# Allegro board testBoard_v2.brd
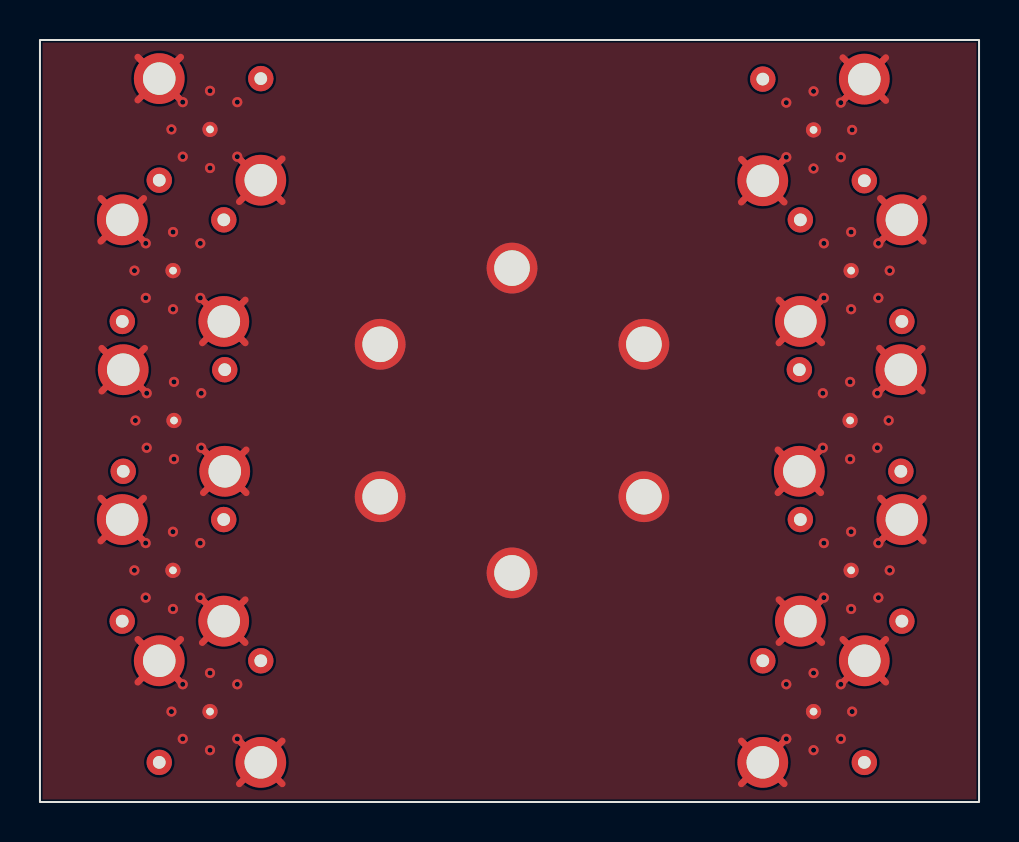
[diagram p0: board, top side]
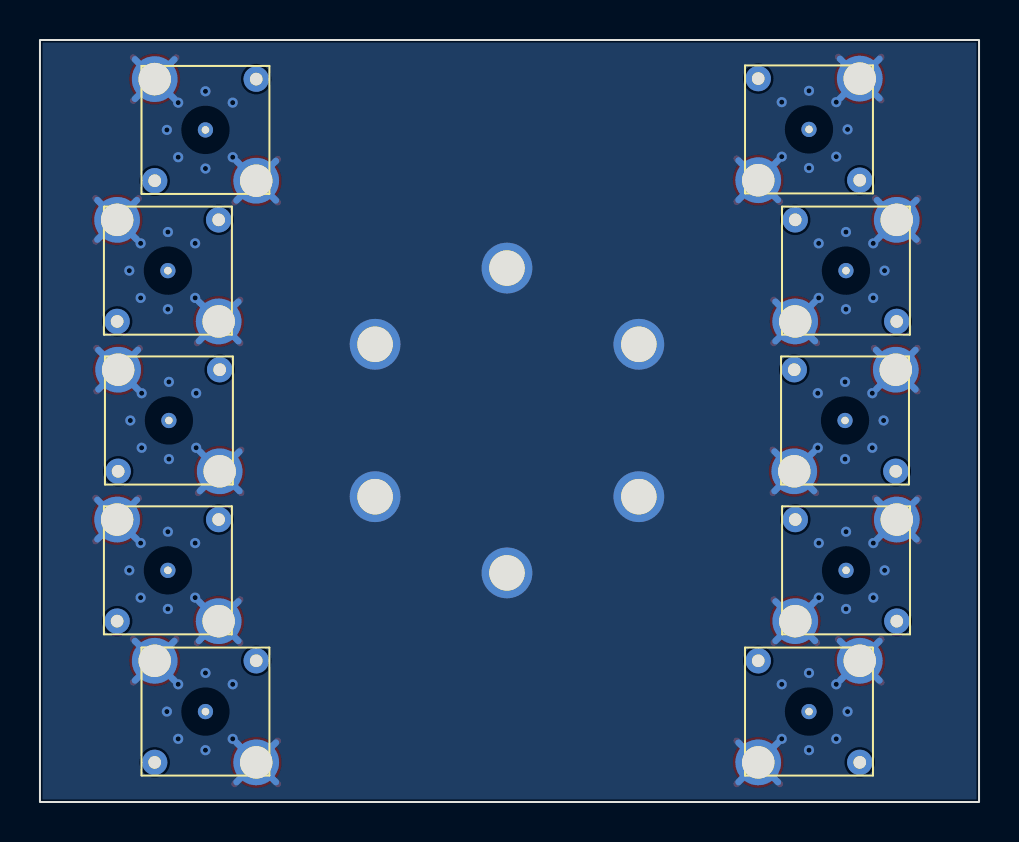
[diagram p1: board, bottom side, seen from below]

Outline 46.99 x 38.1 mm; copper layers: TOP, 02_GND, 03_SIG, BOTTOM. Coordinates in mm from the lower left corner of the outline.
Outline path: rectangle 0,0 46.99,38.1

## Placement (name value [footprint] x y rotation side)
J1  -  [SSMA_BB]  6.71 19.08 90 bottom
J2  -  [SSMA_BB]  40.54 19.08 180 bottom
J3  -  [SSMA_BB]  6.65 11.58 90 bottom
J4  -  [SSMA_BB]  40.59 11.58 180 bottom
J5  -  [SSMA_BB]  6.66 26.57 90 bottom
J6  -  [SSMA_BB]  40.59 26.57 180 bottom
J7  -  [SSMA_BB]  8.51 4.52 90 bottom
J8  -  [SSMA_BB]  38.71 4.52 180 bottom
J9  -  [SSMA_BB]  8.51 33.63 90 bottom
J10  -  [SSMA_BB]  38.71 33.6 180 bottom
MTG1  -  [HOLE070P]  23.62 26.7 0 top
MTG2  -  [HOLE070P]  30.22 22.89 300 top
MTG3  -  [HOLE070P]  30.22 15.27 240 top
MTG4  -  [HOLE070P]  23.62 11.46 180 top
MTG5  -  [HOLE070P]  17.02 15.27 120 top
MTG6  -  [HOLE070P]  17.02 22.89 60 top

## Library data of the parts
J1-J10 = SSMA_BB
MTG1-MTG6 = HOLE070P

## Footprints (pads in the part's own frame, mm; a bottom-side part is the same pattern mirrored in y, then rotated)
HOLE070P
  round 2.54 hole 1.778: 1(0,0)
SSMA_BB
  round 1.27 hole 0.635: (-2.54,-2.54) (2.54,2.54)
  round 0.762 hole 0.381: 1(0,0)
  round 2.54 hole 1.626: 2(-2.54,2.54) 3(2.54,-2.54)

## Nets
GND: J1.2(TP-2) J1.3(TP-3) J2.2(TP-2) J2.3(TP-3) J3.2(TP-2) J3.3(TP-3) J4.2(TP-2) J4.3(TP-3) J5.2(TP-2) J5.3(TP-3) J6.2(TP-2) J6.3(TP-3) J7.2(TP-2) J7.3(TP-3) J8.2(TP-2) J8.3(TP-3) J9.2(TP-2) J9.3(TP-3) J10.2(TP-2) J10.3(TP-3) MTG1.1(TP-1) MTG2.1(TP-1) MTG3.1(TP-1) MTG4.1(TP-1) MTG5.1(TP-1) MTG6.1(TP-1)
MICROWAVE: J1.1(TP-1) J2.1(TP-1) J3.1(TP-1) J4.1(TP-1) J5.1(TP-1) J6.1(TP-1) J7.1(TP-1) J8.1(TP-1) J9.1(TP-1) J10.1(TP-1)

## Via types
v1: diameter 0.508, hole 0.254, TOP to BOTTOM, 70 vias

## Routing (per net, layer and track width the routed paths; a pad name or vN(x,y) marks a point on that pad's centre or on a via; arc(x,y) is an arc through that point)
GND: length 344.5
  TOP w0.33: 8.17,17.61 J1.2 ; J1.2 10.32,15.46 ; J1.2 10.32,17.61 ; J1.2 8.17,15.46 ; 42,22.69 J2.2 ; J2.2 44.15,22.69 ; J2.2 44.15,20.54 ; J2.2 42,20.54 ; 9.97,32.16 J9.2 ; J9.2 12.12,30.01 ; J9.2 9.97,30.01 ; J9.2 12.12,32.16 ; 42.05,15.2 J4.2 ; J4.2 44.2,13.05 ; J4.2 44.2,15.2 ; J4.2 42.05,13.05 ; 3.09,22.69 J1.3 ; J1.3 5.24,20.54 ; J1.3 3.09,20.54 ; J1.3 5.24,22.69 ; 40.17,35.07 J10.2 ; J10.2 42.32,35.07 ; J10.2 40.17,37.22 ; J10.2 42.32,37.22 ; 35.09,29.99 J10.3 ; J10.3 35.09,32.14 ; J10.3 37.24,29.99 ; J10.3 37.24,32.14 ; J8.3 37.24,0.91 ; J8.3 35.09,0.91 ; J8.3 37.24,3.06 ; J8.3 35.09,3.06 ; 36.97,7.97 J4.3 ; J4.3 39.12,10.12 ; J4.3 39.12,7.97 ; J4.3 36.97,10.12 ; 42.05,30.18 J6.2 ; J6.2 44.2,30.18 ; J6.2 42.05,28.03 ; J6.2 44.2,28.03 ; 8.12,10.12 J3.2 ; J3.2 8.12,7.97 ; J3.2 10.27,7.97 ; J3.2 10.27,10.12 ; 36.92,15.46 J2.3 ; J2.3 39.07,17.61 ; J2.3 39.07,15.46 ; J2.3 36.92,17.61 ; 4.89,8.14 J7.3 ; J7.3 4.89,5.99 ; J7.3 7.04,8.14 ; J7.3 7.04,5.99 ; J7.2 12.12,0.91 ; J7.2 9.97,0.91 ; J7.2 9.97,3.06 ; J7.2 12.12,3.06 ; J9.3 7.04,37.24 ; J9.3 7.04,35.09 ; J9.3 4.89,35.09 ; J9.3 4.89,37.24 ; 8.12,22.95 J5.2 ; J5.2 8.12,25.1 ; J5.2 10.27,25.1 ; J5.2 10.27,22.95 ; 3.04,13.05 J3.3 ; J3.3 5.19,15.2 ; J3.3 5.19,13.05 ; J3.3 3.04,15.2 ; 3.04,30.18 J5.3 ; J5.3 5.19,30.18 ; J5.3 3.04,28.03 ; J5.3 5.19,28.03 ; J8.2 42.32,5.99 ; J8.2 40.17,5.99 ; J8.2 40.17,8.14 ; J8.2 42.32,8.14 ; 36.97,25.1 J6.3 ; J6.3 39.12,22.95 ; J6.3 36.97,22.95 ; J6.3 39.12,25.1
  03_SIG w0.33: J2.2 44.06,20.63 ; J2.2 42.09,20.63 ; J2.2 42.09,22.6 ; J2.2 44.06,22.6 ; 10.06,1 J7.2 ; J7.2 12.03,2.97 ; J7.2 10.06,2.97 ; J7.2 12.03,1 ; 37.06,10.03 J4.3 ; J4.3 39.03,10.03 ; J4.3 39.03,8.06 ; J4.3 37.06,8.06 ; J8.2 42.23,8.05 ; J8.2 42.23,6.08 ; J8.2 40.26,6.08 ; J8.2 40.26,8.05 ; J10.2 42.23,35.16 ; J10.2 40.26,37.13 ; J10.2 40.26,35.16 ; J10.2 42.23,37.13 ; J1.3 5.15,22.6 ; J1.3 3.18,22.6 ; J1.3 3.18,20.63 ; J1.3 5.15,20.63 ; 8.21,25.01 J5.2 ; J5.2 10.18,25.01 ; J5.2 8.21,23.04 ; J5.2 10.18,23.04 ; 3.13,30.09 J5.3 ; J5.3 5.1,28.12 ; J5.3 5.1,30.09 ; J5.3 3.13,28.12 ; J1.2 10.23,17.52 ; J1.2 8.26,17.52 ; J1.2 10.23,15.55 ; J1.2 8.26,15.55 ; 4.98,8.05 J7.3 ; J7.3 4.98,6.08 ; J7.3 6.95,8.05 ; J7.3 6.95,6.08 ; 35.18,32.05 J10.3 ; J10.3 37.15,32.05 ; J10.3 35.18,30.08 ; J10.3 37.15,30.08 ; 4.98,35.18 J9.3 ; J9.3 6.95,35.18 ; J9.3 6.95,37.15 ; J9.3 4.98,37.15 ; 42.14,30.09 J6.2 ; J6.2 42.14,28.12 ; J6.2 44.11,30.09 ; J6.2 44.11,28.12 ; J4.2 44.11,13.14 ; J4.2 42.14,13.14 ; J4.2 44.11,15.11 ; J4.2 42.14,15.11 ; 10.06,32.07 J9.2 ; J9.2 12.03,30.1 ; J9.2 10.06,30.1 ; J9.2 12.03,32.07 ; 8.21,10.03 J3.2 ; J3.2 8.21,8.06 ; J3.2 10.18,10.03 ; J3.2 10.18,8.06 ; J3.3 5.1,13.14 ; J3.3 5.1,15.11 ; J3.3 3.13,13.14 ; J3.3 3.13,15.11 ; 37.06,23.04 J6.3 ; J6.3 39.03,23.04 ; J6.3 39.03,25.01 ; J6.3 37.06,25.01 ; J8.3 37.15,2.97 ; J8.3 35.18,1 ; J8.3 35.18,2.97 ; J8.3 37.15,1 ; 37.01,15.55 J2.3 ; J2.3 37.01,17.52 ; J2.3 38.98,15.55 ; J2.3 38.98,17.52
  BOTTOM w0.33: 42.14,28.12 J6.2 ; J6.2 44.11,28.12 ; J6.2 44.11,30.09 ; J6.2 42.14,30.09 ; 4.98,8.05 J7.3 ; J7.3 4.98,6.08 ; J7.3 6.95,8.05 ; J7.3 6.95,6.08 ; J1.2 10.23,15.55 ; J1.2 10.23,17.52 ; J1.2 8.26,15.55 ; J1.2 8.26,17.52 ; 4.98,37.15 J9.3 ; J9.3 6.95,35.18 ; J9.3 4.98,35.18 ; J9.3 6.95,37.15 ; J10.2 42.23,35.16 ; J10.2 42.23,37.13 ; J10.2 40.26,35.16 ; J10.2 40.26,37.13 ; 3.18,20.63 J1.3 ; J1.3 5.15,22.6 ; J1.3 3.18,22.6 ; J1.3 5.15,20.63 ; 35.18,1 J8.3 ; J8.3 37.15,1 ; J8.3 35.18,2.97 ; J8.3 37.15,2.97 ; 42.14,13.14 J4.2 ; J4.2 42.14,15.11 ; J4.2 44.11,13.14 ; J4.2 44.11,15.11 ; J3.2 10.18,10.03 ; J3.2 10.18,8.06 ; J3.2 8.21,8.06 ; J3.2 8.21,10.03 ; 37.01,17.52 J2.3 ; J2.3 38.98,15.55 ; J2.3 37.01,15.55 ; J2.3 38.98,17.52 ; J10.3 37.15,32.05 ; J10.3 35.18,32.05 ; J10.3 35.18,30.08 ; J10.3 37.15,30.08 ; J5.3 5.1,30.09 ; J5.3 3.13,30.09 ; J5.3 5.1,28.12 ; J5.3 3.13,28.12 ; J5.2 10.18,25.01 ; J5.2 10.18,23.04 ; J5.2 8.21,25.01 ; J5.2 8.21,23.04 ; J7.2 12.03,1 ; J7.2 12.03,2.97 ; J7.2 10.06,2.97 ; J7.2 10.06,1 ; 37.06,10.03 J4.3 ; J4.3 39.03,8.06 ; J4.3 39.03,10.03 ; J4.3 37.06,8.06 ; 10.06,32.07 J9.2 ; J9.2 12.03,30.1 ; J9.2 12.03,32.07 ; J9.2 10.06,30.1 ; 3.13,15.11 J3.3 ; J3.3 5.1,13.14 ; J3.3 5.1,15.11 ; J3.3 3.13,13.14 ; 42.09,22.6 J2.2 ; J2.2 44.06,20.63 ; J2.2 42.09,20.63 ; J2.2 44.06,22.6 ; 37.06,23.04 J6.3 ; J6.3 39.03,23.04 ; J6.3 37.06,25.01 ; J6.3 39.03,25.01 ; 40.26,6.08 J8.2 ; J8.2 42.23,6.08 ; J8.2 42.23,8.05 ; J8.2 40.26,8.05
  vias: v1(4.73,26.57) v1(4.72,11.58) v1(4.78,19.08) v1(5.3,27.93) v1(5.3,25.2) v1(5.34,20.44) v1(5.34,17.71) v1(5.29,12.95) v1(5.29,10.22) v1(6.58,33.63) v1(6.58,4.52) v1(6.66,28.5) v1(6.66,24.64) v1(6.71,21.01) v1(6.71,17.14) v1(6.65,13.51) v1(6.65,9.65) v1(7.15,34.99) v1(7.15,32.27) v1(7.15,5.89) v1(7.15,3.16) v1(8.02,27.93) v1(8.02,25.2) v1(8.02,12.95) v1(8.02,10.22) v1(8.07,20.44) v1(8.07,17.71) v1(8.51,35.56) v1(8.51,31.7) v1(8.51,6.45) v1(8.51,2.59) v1(9.87,34.99) v1(9.87,32.27) v1(9.87,5.89) v1(9.87,3.16) v1(37.35,34.97) v1(37.35,32.24) v1(37.35,5.89) v1(37.35,3.16) v1(38.71,35.53) v1(38.71,31.67) v1(38.71,6.45) v1(38.71,2.59) v1(39.23,27.93) v1(39.23,25.2) v1(39.17,20.44) v1(39.17,17.71) v1(39.23,12.95) v1(39.23,10.22) v1(40.07,34.97) v1(40.07,32.24) v1(40.07,5.89) v1(40.07,3.16) v1(40.54,21.01) v1(40.54,17.14) v1(40.64,33.6) v1(40.59,28.5) v1(40.59,24.64) v1(40.59,13.51) v1(40.59,9.65) v1(40.64,4.52) v1(41.9,20.44) v1(41.9,17.71) v1(41.95,27.93) v1(41.95,25.2) v1(41.95,12.95) v1(41.95,10.22) v1(42.52,26.57) v1(42.47,19.08) v1(42.52,11.58)
MICROWAVE: length 198.2
  03_SIG w0.33: 20.7,19.08 22.58,19.08 ; 20.7,19.08 J1.1 ; 20.7,19.08 arc(18.51,13.78) 13.21,11.58 J3.1 ; 20.7,19.08 arc(18.51,24.37) 13.21,26.57 J5.1 ; 22.58,19.08 24.41,19.08 ; 22.58,19.08 22.58,18.59 arc(18.46,8.64) J7.1 ; 22.58,19.08 22.58,19.56 arc(18.46,29.51) J9.1 ; 24.41,19.08 24.41,19.3 arc(28.6,29.42) J10.1 ; 24.41,19.08 26.29,19.08 ; 24.41,19.08 24.41,18.82 arc(28.6,8.71) J8.1 ; 26.29,19.08 J2.1 ; 26.29,19.08 arc(28.48,13.78) 33.78,11.58 J4.1 ; 26.29,19.08 arc(28.48,24.37) 33.78,26.57 J6.1

## Copper pours and planes (outline as drawn; the poured copper is in the pictures)
GND on TOP, BOTTOM, 02_GND, 03_SIG: 0.13,0.13 46.86,0.13 46.86,37.97 0.13,37.97
